# Altium PCB mach in.PcbDoc
Units mil, origin at the board's own origin, x right, y up, seen from the top; angles counter-clockwise.
Board outline 1745 x 2400 mil, 2 copper layers (Top Layer, Bottom Layer); 13 components, 17 nets, 82 pads, 0 vias.
Unrouted connection lines stored in the file: 2.
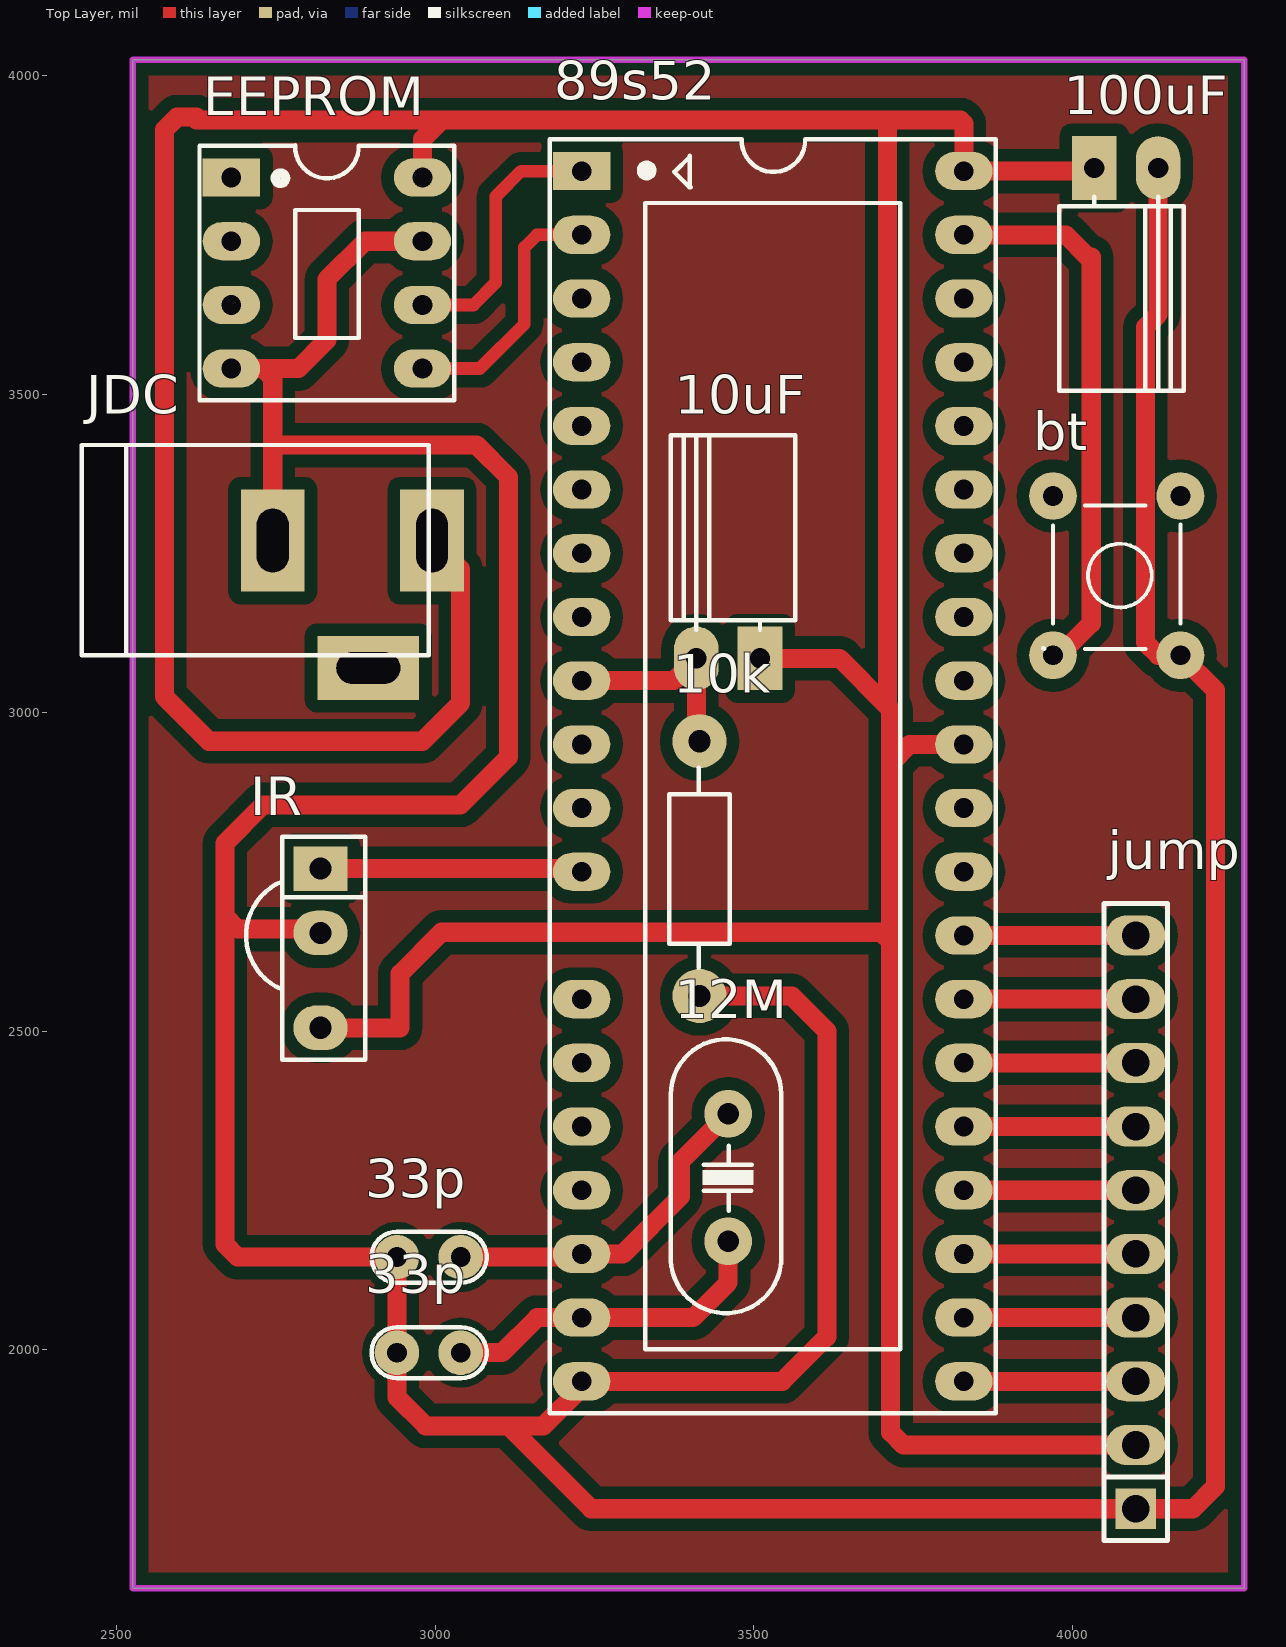
[diagram p0: Top Layer view]
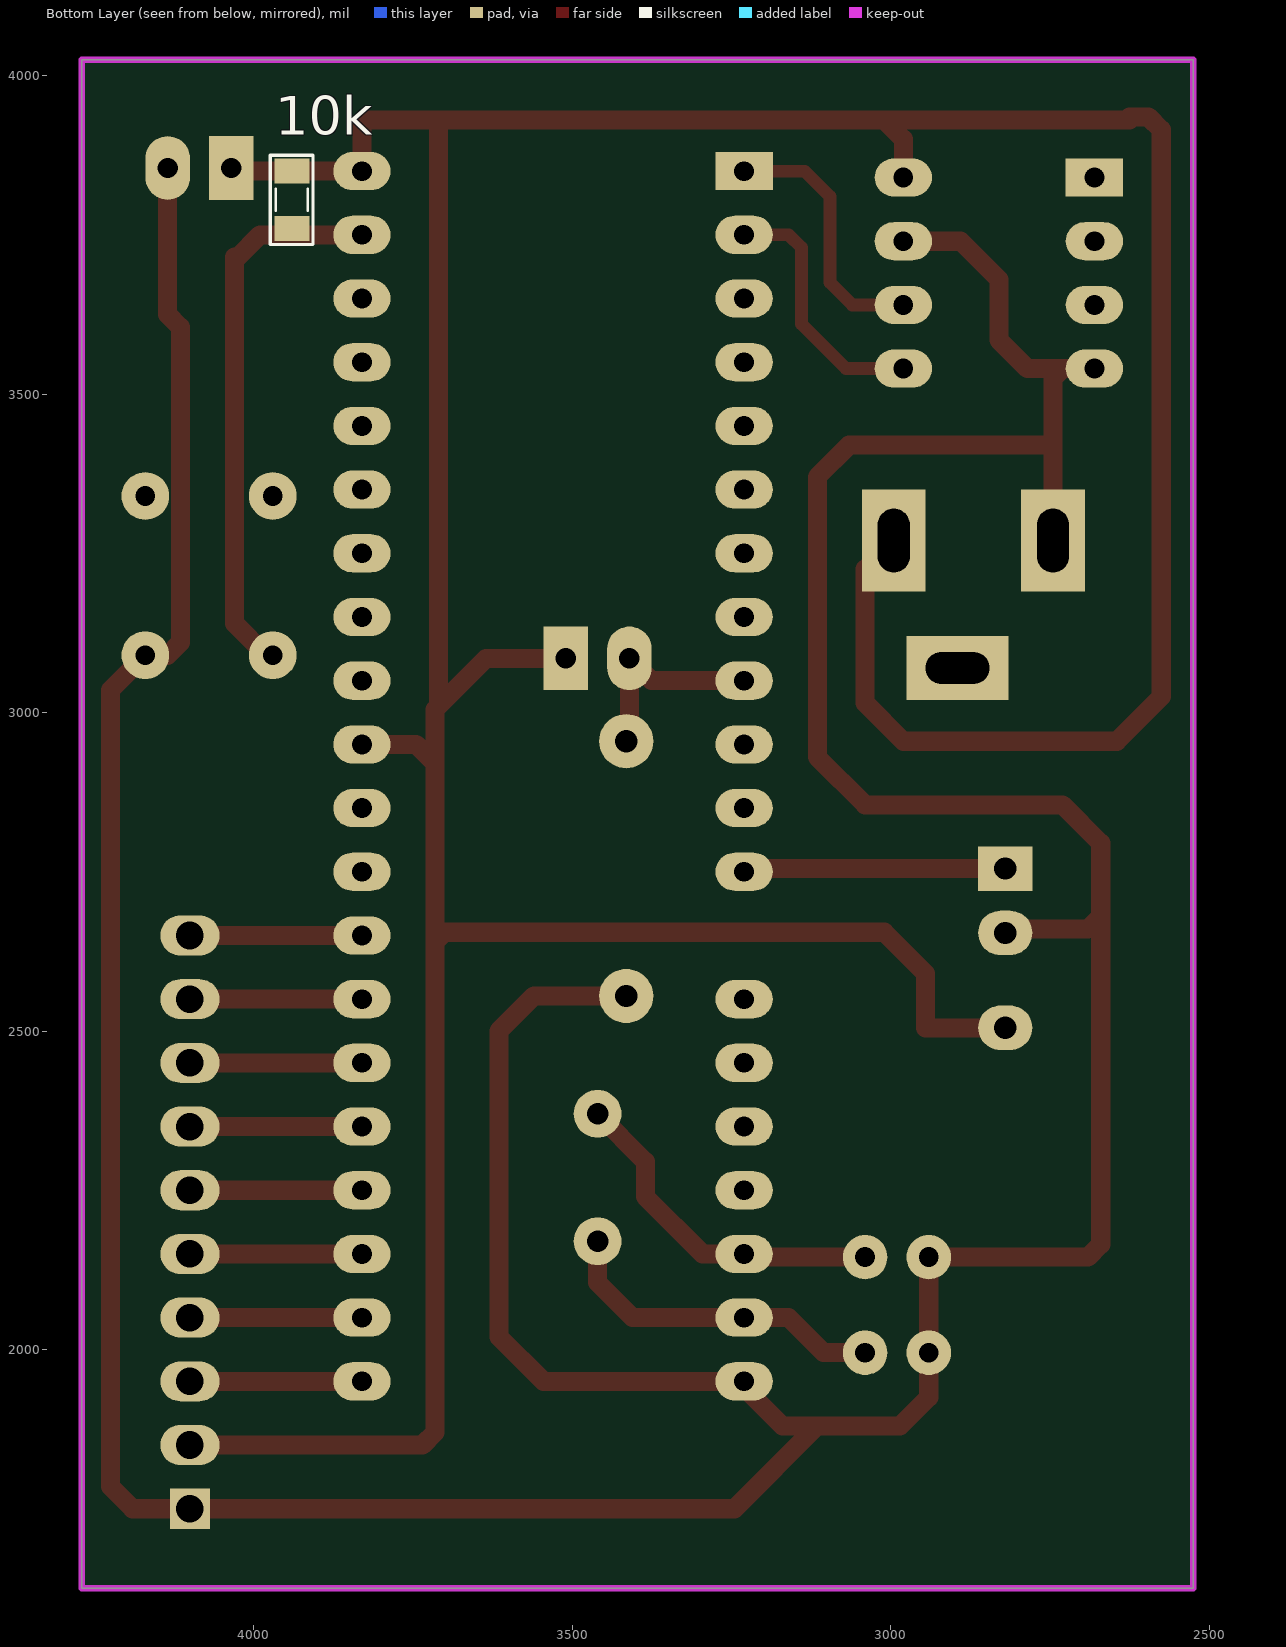
[diagram p1: Bottom Layer view, seen from below]
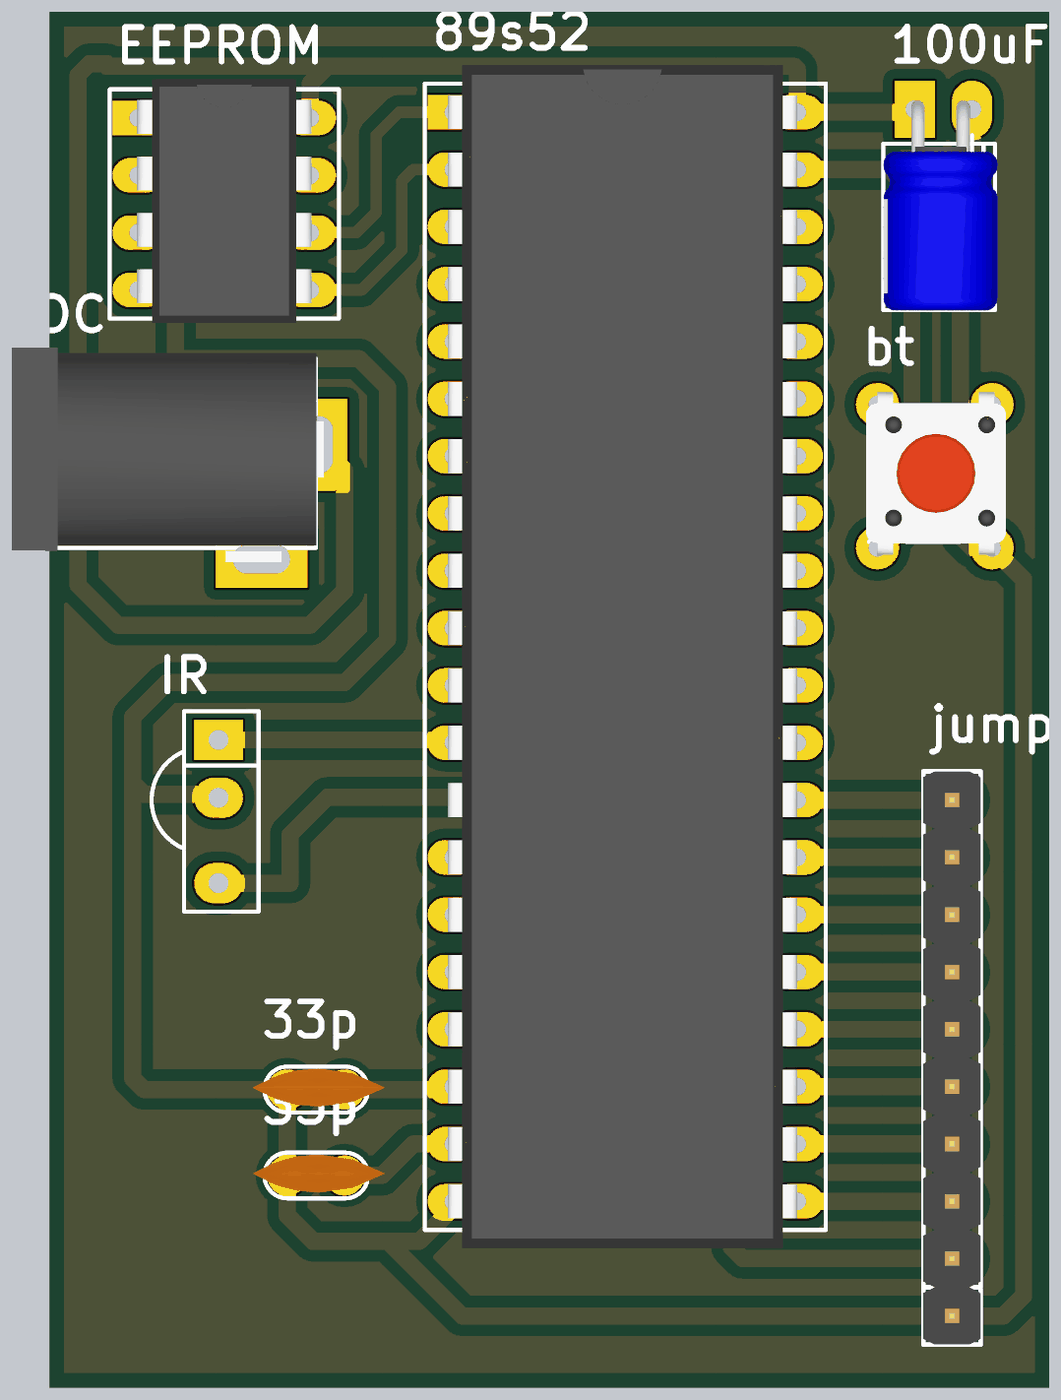
[diagram p2: 3D render of the assembled board from above, using the file's embedded part models]

## Layer stack, top to bottom
Top Solder: solder mask 0.4, Solder Resist, Dk 3.5
Top Layer: signal copper 1.4
Dielectric 1: dielectric 12.6, FR-4, Dk 4.8
Bottom Layer: signal copper 1.4
Bottom Solder: solder mask 0.4, Solder Resist, Dk 3.5

## Board outline
2525,1625 2525,4025 4270,4025 4270,1625

## Design rules (kind name [scope] priority, off if disabled: settings)
Clearance [All] p1: gap=20 ignorepadtopadclearanceinfootprint=FALSE
PolygonConnect [All] p1: connectstyle=Relief reliefconductorwidth=10 reliefentries=4 polygonreliefangle="90 Angle" airgapwidth=10
RoomDefinition "nguyen li" [InComponentClass('nguyen li')] p1: confinementstyle=ConfineIn formatcopy=TRUE lockcomponents=FALSE outline 7045,1060 11155,1060 11155,3240 7045,3240
RoutingVias [All] p1: holewidth=28 width=50 viastyle="Through Hole" minholewidth=28 minwidth=50 maxholewidth=28 maxwidth=50
SolderMaskExpansion [All] p1: expansion=4
Width [All] p1: maxlimit=30 minlimit=10 preferedwidth=20
30 further rules are at their usual default settings.

## Classes and differential pairs
component class "nguyen li": 10k 10uF 12M 33p 89s52 100uF bt EEPROM IR JDC jump

## Components (designator, comment, footprint, x,y, rotation, side; value= is the part's Value field where it differs from the comment)
10k "Res" RES-SMD-0805 3940,3805 r270 bottom
10k "Res" RES-1/4W 3410,2740 r270 top
10uF "tu hoa" CA-ALU-5W 3510,3085 r180 top value=104
12M "thach anh" XT2 3460,2270 r90 top value=4Mhz
33p "cap" CN1 2940,2145 r0 top value=100pF
33p "cap" CN1 2940,1995 r0 top value=100pF
89s52 "AT89S52" DIP40/W0.6 3230,3850 r270 top
100uF "tu hoa" CA-ALU-5W 4035,3855 r0 top value=104
bt "SW" SW2-DIP 4170,3340 r270 top value="Button chip 4 pin"
EEPROM "24C04" DIP8 2830,3695 r270 top value=24Cxx
IR "IR1" IR2 2820,2655 r270 top
JDC "Jac DC" DC-IN 2870,3170 r0 top
jump "JP10" JP10-D1T 4100,1750 r90 top

## Footprints (in the part's own frame and the unit in brackets; to place one, negate y for a bottom-side part, rotate by r counter-clockwise, add the part's x,y. Pads: shape width x height; smd on the part's side, far side on the other; paste and mask are expansions set on the pad)
CA-ALU-5W [mil] "Tu hoa < 22uF/16>50V"
  rect 70x100 hole 32: 1(0,0)
  oval 70x100 hole 32: 2(100,0)
  silkscreen extent -55,-350 140,-45, body extent -54,-351 144,16, height 199
CN1 [mil]
  round 70 hole 31: 1(0,0) 2(100,0)
  silkscreen extent -40,-40 141,40, body extent -60,-30 170,37, height 265
DC-IN [mil] "Jac DC input"
  rect 100x160 hole 50 slot 100 at 90 deg: 1(125,100) 2(-125,100)
  rect 160x100 hole 50 slot 100 at 0 deg: 3(25,-100)
  silkscreen extent -425,-80 120,250, body extent -410,-105 134,269, height 434
DIP8 [mil] "DIP, 8-Leads, Row Spacing 7.62mm, Pitch 2.54mm, Body 9.91x6.73mm"
  rect 60x90 hole 31: 1(-145,-150)
  oval 60x90 hole 31: 2(-45,-150) 3(55,-150) 4(155,-150) 5(155,150) 6(55,150) 7(-45,150) 8(-145,150)
  silkscreen extent -195,-200 205,200, body extent -213,-153 213,153, height 177
DIP40/W0.6 [mil] "40 PIN, W 600mil, Pin to pin 100mil"
  rect 60x90 hole 31: 1(0,0)
  oval 60x90 hole 31: 2(100,0) 3(200,0) 4(300,0) 5(400,0) 6(500,0) 7(600,0) 8(700,0) 9(800,0) 10(900,0) 11(1000,0) 12(1100,0) 14(1300,0) 15(1400,0) 16(1500,0) 17(1600,0) 18(1700,0) 19(1800,0) 20(1900,0) 21(1900,600) 22(1800,600) 23(1700,600) 24(1600,600) 25(1500,600) 26(1400,600) 27(1300,600) 28(1200,600) 29(1100,600) 30(1000,600) 31(900,600) 32(800,600) 33(700,600) 34(600,600) 35(500,600) 36(400,600) 37(300,600) 38(200,600) 39(100,600) 40(0,600)
  round 0 all layers, no hole: 13(1200,0)
  silkscreen extent -50,-50 1950,650, body extent -82,-10 1982,600, height 224
IR2 [mil] "Receiver Infared IC"
  rect 70x85 hole 35: 1(-100,0)
  oval 70x85 hole 35: 2(1,0) 3(150,0)
  silkscreen extent -150,-117 200,70
JP10-D1T [mm] "10 pins, 1 row, straight, gold plating"
  rect 1.6x1.6 hole 1.1: 1(0,0)
  oval 1.6x2.362 hole 1.1: 2(2.54,0) 3(5.08,0) 4(7.62,0) 5(10.16,0) 6(12.7,0) 7(15.24,0) 8(17.78,0) 9(20.32,0) 10(22.86,0)
  silkscreen extent -1.27,-1.27 24.13,1.27, body extent -1.27,-1.27 24.13,1.27, height 8.54
RES-1/4W [mil]
  round 85 hole 35: 1(-215,5) 2(185,5)
  silkscreen extent -173,-42 141,52, body extent -227,-42 197,52, height 95
RES-SMD-0805 [mil]
  rect 39.37x55 smd: 1(-45,0) 2(45,0)
  silkscreen extent -70,-34 70,33, body extent -39,-25 39,25, height 31
SW2-DIP [mil] "SW button 4pin, 250 x250 mil"
  round 75 hole 31: 1(0,0) 2(0,-200) 3(250,-200) 4(250,0)
  silkscreen extent 15,-215 240,0, body extent -36,-220 276,24, height 276
XT2 [mil] "Footpin for Crystal 2 pin"
  round 75 hole 34: 1(-100,0) 2(100,0)
  silkscreen extent -213,-83 217,90, body extent -216,-87 216,90, height 144

## Part data
10k: library part Res-SMD, "Resistor", Manufacturer="Generic Components", Class=Passive, Published=08/06/2000, Publisher="Altium Hobart Technology Centre"
10k: Manufacturer="Generic Components", Class=Passive, Published=08/06/2000, Publisher="Altium Hobart Technology Centre", SubClass=R
10uF 100uF: library part CN-ALU-DIP, "Capacitor (Semiconductor SIM Model)", LatestRevisionDate=17-Jul-2002, LatestRevisionNote="Re-released for DXP Platform.", PackageReference=C1206, Publisher="Altium Limited"
12M: library part XT2, "Crystal, 32.768 KHz, -40 to 85 degC, 3.2 x 1.5 x 0.9 mm SMD"
33p 33p: library part CN1, "Cap np  1pF - 472pF"
89s52: "AT89S52, 8k Byte Flash Memory , 40 Pin"
bt: library part SW4, "Switch button 4 pin"
EEPROM: library part 24Cxx, "Standard 2-Wire Bus Interface Serial EEPROM", Copyright by=VanDungEvn
IR: "Receiver Infraed IC"
JDC: library part DCIN, "Jac DC input"
jump: "WR-PHD 2.54 mm Angled Socket Header", Manufacturer="Würth Elektronik eiSos GmbH", partNo=613010143121, ComponentLink1 Description=Manufacturer, ComponentLink1URL=http://www.we-online.com, ComponentLink2 Description=Datasheet, ComponentLink2URL=http://katalog.we-online.de/em/datasheet/6130xx143121.pdf, Created by="Karrer Zheng", Created Date="29 March 2013", NoPins=10

## Nets (pads, with @x,y where several pads share a name; then routed paths per layer and width w, separated by ;. In a path a pad name is that pad's centre, name@x,y a point inside that pad or via, vN(x,y) a via of type N, cw(c..) or ccw(c..) an arc to the next point about the centre after c; other vN are vias at no path point)
GND: 10k.2@3415,2555 33p.1 89s52.20 100uF.2 bt.4 EEPROM.4 EEPROM.7 IR.2 JDC.2 jump.1 | length 8118.4
  Top Layer w30: EEPROM.4 2730,3540 ; JDC.2 2745,3420 ; IR.2 2814,2660 2690,2660 2670,2680 ; EEPROM.7 2890,3740 2830,3680 2830,3585 2785,3540 2730,3540 ; 10k.2@3415,2555 3560,2555 3615,2500 3615,2020 3545,1950 89s52.20 3230,1940 3170,1880 3115,1880 ; 100uF.2 4135,3625 4115,3605 4115,3110 4135,3090 bt.4 4225,3035 4225,1785 4190,1750 jump.1 3245,1750 3115,1880 ; 2670,2680 2670,2165 2690,2145 2940,2145 2940,1995 2940,1925 2985,1880 3115,1880 ; 2670,2680 2670,2795 2730,2855 3040,2855 3115,2930 3115,3370 3065,3420 2745,3420 ; 2730,3540 2745,3525 2745,3420
hoclenh: 10k.2@3940,3760 89s52.39 bt.3 | length 870.2
  Top Layer w30: 89s52.39 3990,3750 4025,3715 4030,3715 4030,3140 3980,3090 bt.3
IR: 89s52.12 IR.1 | length 412.1
  Top Layer w30: IR.1 3225,2755 89s52.12
Net10k_1: 10k.1@3415,2955 10uF.2 89s52.9 | length 326.6
  Top Layer w30: 89s52.9 3375,3050 10uF.2 3410,2960 10k.1@3415,2955
Net12M_1: 12M.1 33p.2@3040,1995 89s52.19 | length 530.6
  Top Layer w30: 33p.2@3040,1995 3105,1995 3160,2050 89s52.19 3405,2050 3460,2105 12M.1
Net12M_2: 12M.2 33p.2@3040,2145 89s52.18 | length 545.4
  Top Layer w30: 33p.2@3040,2145 3225,2145 89s52.18 3295,2150 3385,2240 3385,2295 12M.2
Net89s52_21: 89s52.21 jump.3 | length 270
  Top Layer w30: 89s52.21 jump.3
Net89s52_22: 89s52.22 jump.4 | length 270
  Top Layer w30: 89s52.22 jump.4
Net89s52_23: 89s52.23 jump.5 | length 270
  Top Layer w30: 89s52.23 jump.5
Net89s52_24: 89s52.24 jump.6 | length 270
  Top Layer w30: 89s52.24 jump.6
Net89s52_25: 89s52.25 jump.7 | length 270
  Top Layer w30: 89s52.25 jump.7
Net89s52_26: 89s52.26 jump.8 | length 270
  Top Layer w30: 89s52.26 jump.8
Net89s52_27: 89s52.27 jump.9 | length 270
  Top Layer w30: 89s52.27 jump.9
Net89s52_28: 89s52.28 jump.10 | length 270
  Top Layer w30: 89s52.28 jump.10
scl: 89s52.1 EEPROM.6 | length 416.1
  Top Layer w20: EEPROM.6 3060,3640 3095,3675 3095,3810 3135,3850 89s52.1
sda: 89s52.2 EEPROM.5 | length 407.3
  Top Layer w20: EEPROM.5 3070,3540 3140,3610 3140,3730 3160,3750 89s52.2
VCC: 10k.1@3940,3850 10uF.1 89s52.31 89s52.40 100uF.1 EEPROM.8 IR.3 JDC.1 jump.2 | length 7164.3
  Top Layer w30: IR.3 2945,2505 2945,2590 3010,2655 3700,2655 3715,2640 ; EEPROM.8 2980,3900 3010,3930 ; JDC.1 3040,3225 3040,3015 2980,2955 2645,2955 2575,3025 2575,3915 2595,3935 2625,3935 2625,3930 3010,3930 ; 10uF.1 3635,3085 3710,3010 ; 89s52.31 3745,2950 3715,2920 ; 100uF.1 4030,3850 89s52.40 3830,3925 3825,3930 3710,3930 ; jump.2 3735,1850 3715,1870 3715,2640 ; 3010,3930 3710,3930 ; 3710,3010 3710,3930 ; 3710,3010 3715,3005 3715,2920 ; 3715,2640 3715,2920
pads on no net: 89s52.3 89s52.4 89s52.5 89s52.6 89s52.7 89s52.8 89s52.10 89s52.11 89s52.13 89s52.14 89s52.15 89s52.16 89s52.17 89s52.29 89s52.30 89s52.32 89s52.33 89s52.34 89s52.35 89s52.36 89s52.37 89s52.38 bt.1 bt.2 EEPROM.1 EEPROM.2 EEPROM.3 JDC.3

## Polygon pours and split planes (outlines as drawn)
no net on Top Layer "NONET_L01_P004" (solid, pour order 4): 2525,4025 4270,4025 4270,1625 2525,1625

## Keep-outs
Keep-Out Layer:
  lines w10: 2525,1625 4270,1625 4270,2970.75 4270,4025 2525,4025 2525,1625